# Altium PCB EN_Probe_VR_2.PcbDoc
Units mil, origin at the board's own origin, x right, y up, seen from the top; angles counter-clockwise.
Board outline 1375 x 901.57 mil, 2 copper layers (Top Layer, Bottom Layer); 25 components, 13 nets, 73 pads, 12 vias.
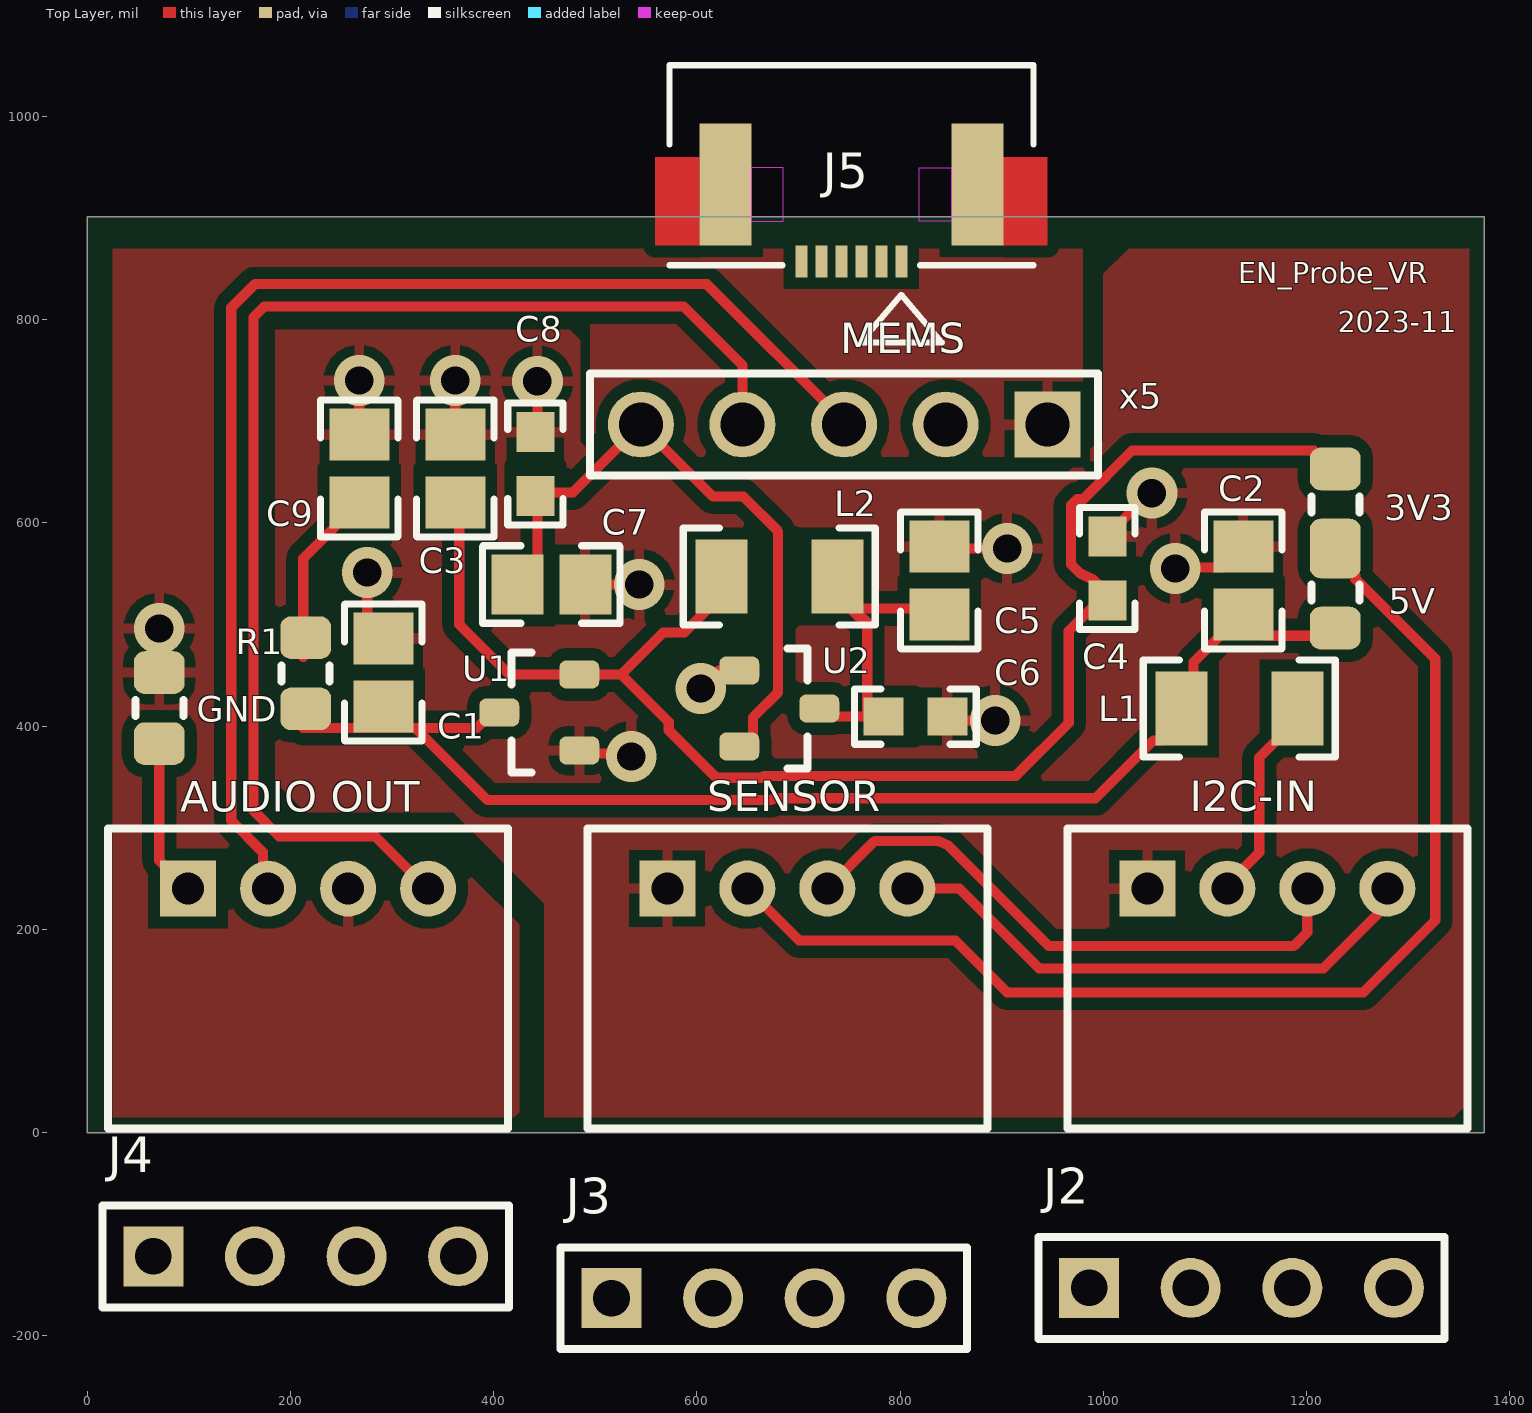
[diagram p0: Top Layer view]
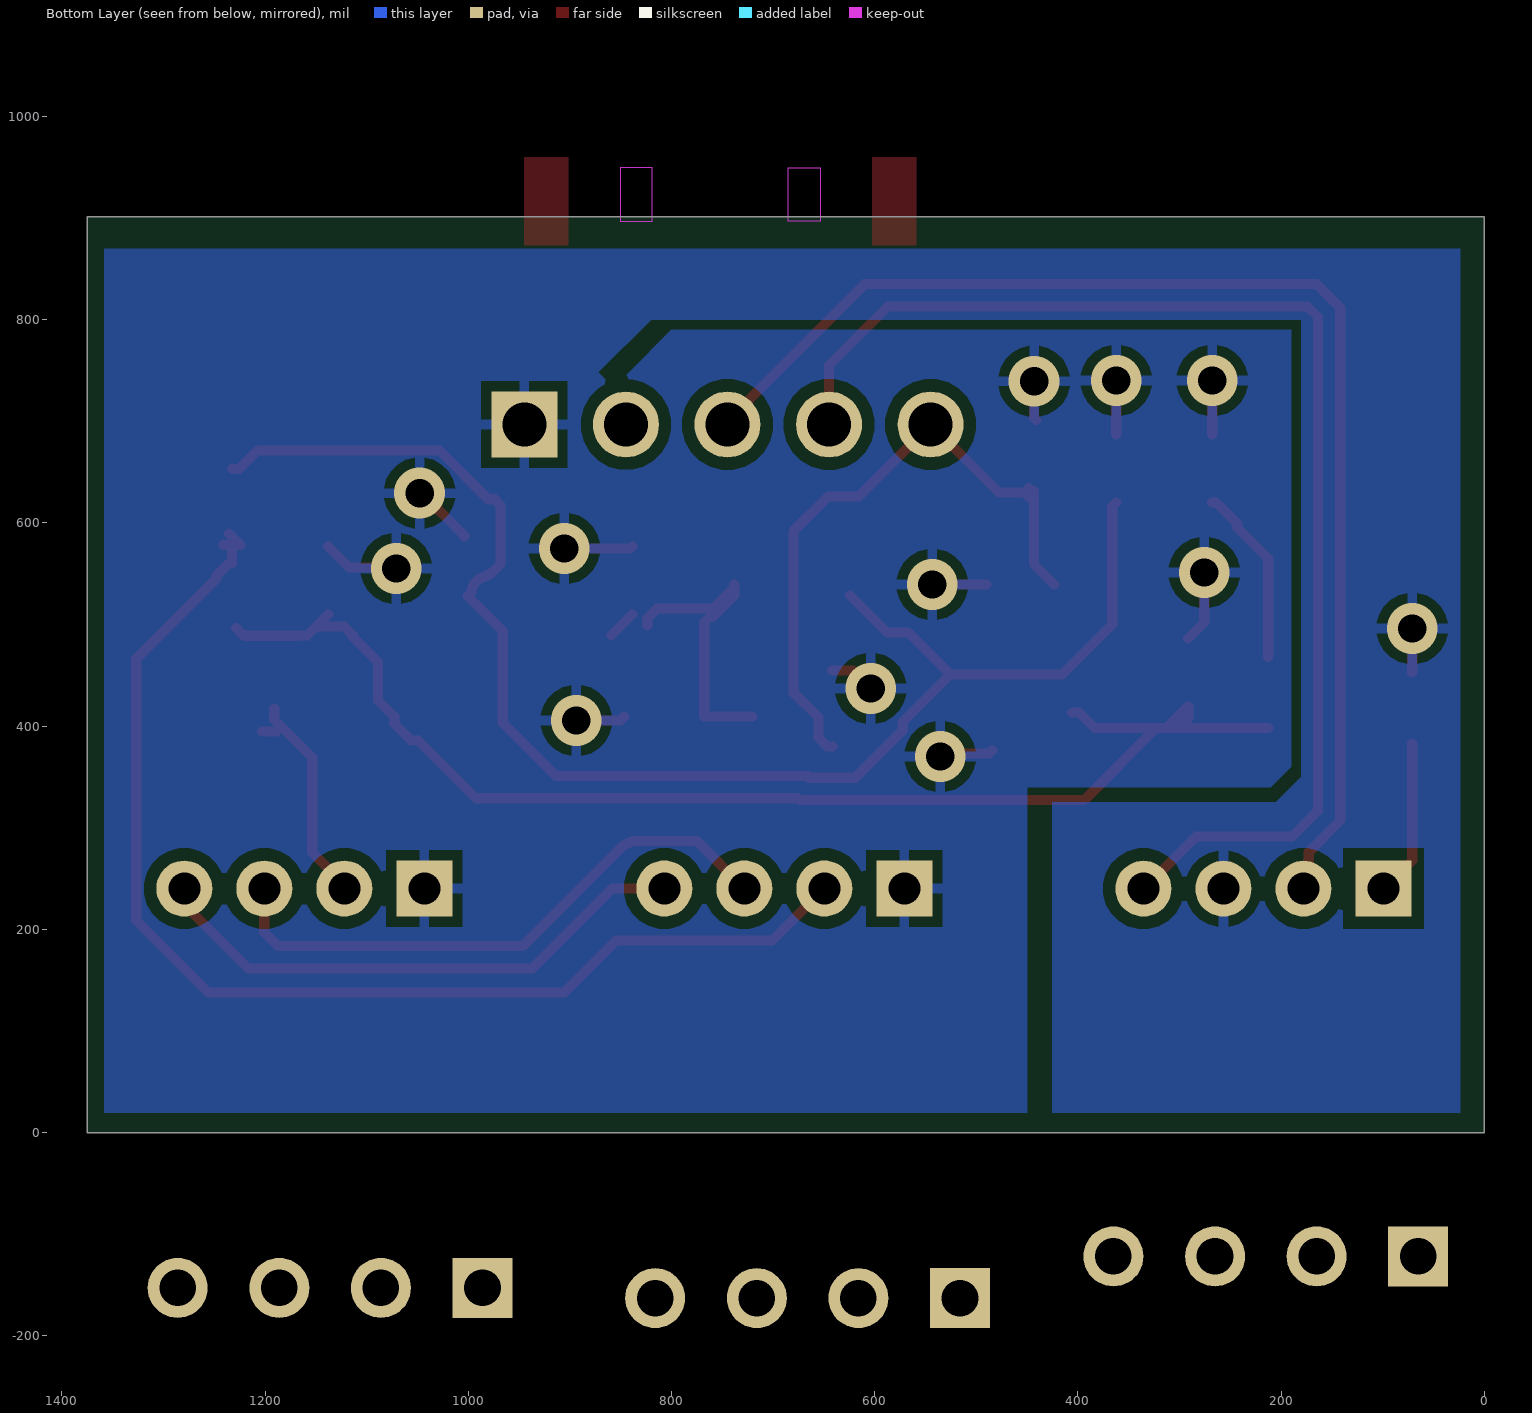
[diagram p1: Bottom Layer view, seen from below]

## Layer stack, top to bottom
Top Solder: solder mask 0.4, Solder Resist, Dk 3.5
Top Layer: signal copper 1.4
Dielectric1: dielectric 12.6, FR-4, Dk 4.8
Bottom Layer: signal copper 1.4
Bottom Solder: solder mask 0.4, Solder Resist, Dk 3.5

## Board outline
0,0 0,901.57 1375,901.57 1375,0

## Design rules (kind name [scope] priority, off if disabled: settings)
Clearance [All] p1: gap=12 ignorepadtopadclearanceinfootprint=FALSE except(0: Arc-Hole Track-Hole SMDPad-Hole THPad-Hole Via-Hole Fill-Hole Poly-Hole Region-Hole Text-Hole)
HoleSize [All] p1: absolutevalues=TRUE maxlimit=200 minlimit=1 maxpercent=80.000 minpercent=20.000
PolygonConnect [All] p1: connectstyle=Relief reliefconductorwidth=10 reliefentries=4 polygonreliefangle="90 Angle" airgapwidth=10
RoutingVias [All] p1: holewidth=28 width=50 viastyle="Through Hole" minholewidth=28 minwidth=50 maxholewidth=28 maxwidth=50
SilkToSilkClearance [All] p1: silktosilkclearance=2
SilkToSolderMaskClearance SilkscreenOverComponentPads [IsPad] p1 off: minsilkscreentomaskgap=10 clearancetoexposedcopper=TRUE
SolderMaskExpansion [All] p1: expansion=4 istentingtop=FALSE
Width [All] p1: maxlimit=30 minlimit=10 preferedwidth=10 minimp=50.000000 maximp=50.000000 favimp=50.000000
27 further rules are at their usual default settings.

## Classes and differential pairs
net class "Power Nets": NetC7_1
component class EN_Probe_VR_Chain_BD1: 3V3 5V C1 C2 C3 C4 C5 C6 C7 C8 C9 GND L1 L2 R1 U1 U2 x5

## Components (designator, comment, footprint, x,y, rotation, side; value= is the part's Value field where it differs from the comment)
3V3 "CRCW080522R0JNEA" 0805#1 1228.35,618.11 r90 top value=22 (schematic designator R3V3)
5V "CRCW080522R0JNEA" 0805#1 1228.35,531.5 r270 top value=22 (schematic designator R5V)
C1 "10uF" 0805#2 291.34,452.76 r90 top
C2 ".33UF" 0805#2 1137.8,543.31 r270 top
C3 "10uF" 0805#2 362.2,653.54 r90 top
C4 "0.1UF" 0603 1003.94,555.12 r90 top
C5 "10uF" 0805#2 838.58,543.31 r90 top
C6 "0.1UF" 0603 814.96,409.45 r180 top
C7 "10uF" 0805#2 456.69,539.37 r0 top
C8 "0.1UF" 0603 441,658 r270 top
C9 "680nF" 0805#2 267.72,653.54 r270 top
GND "CRCW080522R0JNEA" 0805#1 70.87,417.76 r270 top value=22 (schematic designator R3)
J2 "Comment" HDR1X4 986,-153 r0 top
J3 "Comment" HDR1X4 516,-163 r0 top
J4 "Comment" HDR1X4 65,-122 r0 top
J4 "AUDIO OUT" "HDRA1X4 2MM" 99.26,240 r180 top
J5 "Comment" CON_527450697_ 752,952 r180 top
L1 "2.2uH" 1206 1133.86,417.32 r0 top
L2 "1.0uH" 1206 681.1,547.24 r180 top
R1 "CRCW080522R0JNEA" 0805#1 215,452 r270 top value=22
U1 "3.3V REG" SOT23-3 444.88,413.39 r180 top
U2 "2.8V REG" SOT23-3 681.1,417.32 r0 top
x2 "I2C-IN" "HDRA1X4 2MM" 1043.31,240.15 r180 top
x3 "SENSOR" "HDRA1X4 2MM" 570.87,240.16 r180 top
x5 "MEMS" HDR1X5 944.88,696.85 r180 top (schematic designator J5)

## Footprints (in the part's own frame and the unit in brackets; to place one, negate y for a bottom-side part, rotate by r counter-clockwise, add the part's x,y. Pads: shape width x height; smd on the part's side, far side on the other; paste and mask are expansions set on the pad)
0603 [mm] "0603 from SM-752 data"
  rect 1x0.95 smd: 1(-0.8,0) 2(0.8,0)
  silkscreen extent -1.52,-0.69 1.52,0.69, body extent -0.87,-0.47 0.87,0.47, height 1
0805#1 [mil] "Chip Capacitor, 2-Leads, Body 2.0x1.25mm, IPC"
  rrect50% 42x50 smd: 1(-35,0) 2(35,0)
  silkscreen extent -8,-24 8,24, body extent -39,-24 39,24, height 47
0805#2 [mil] "0805 from SM-752 data"
  rect 51.18x59.06 smd: 1(-33.46,0) 2(33.47,0)
  silkscreen extent -68,-38 68,38, body extent -43,-29 43,29, height 57
1206 [mm] "1206 from SM-752 data"
  rect 1.3x1.85 smd: 1(-1.45,0) 2(1.45,0)
  silkscreen extent -2.4,-1.21 2.4,1.21, body extent -1.7,-0.9 1.7,0.9, height 1.35
CON_527450697_ [mm]
  rect 0.3x0.8 smd paste+0 mask+0.076: 1(-1.25,2.4) 2(-0.75,2.4) 3(-0.25,2.4) 4(0.25,2.4) 5(0.75,2.4) 6(1.25,2.4)
  rect 1.3x3.05 smd paste+0 mask+0.076: P1(-3.15,0.475) P2(3.15,0.475)
  Top Layer region: 3.8,-0.2 3.8,2 4.9,2 4.9,-0.2
  Top Layer region: -3.8,-0.2 -3.8,2 -4.9,2 -4.9,-0.2
  Keep-Out Layer region: 2.5,0.06 2.5,1.4 1.7,1.4 1.7,0.06
  Keep-Out Layer region: -2.5,0.06 -2.5,1.4 -1.7,1.4 -1.7,0.06
  silkscreen extent -4.55,-2.5 4.55,4.43
HDR1X4 [mm] "Connector; Header; 4 Position"
  rect 1.5x1.5 hole 0.914: 1(0,0)
  round 1.5 hole 0.914: 2(2.54,0) 3(5.08,0) 4(7.62,0)
  silkscreen extent -1.27,-1.27 8.89,1.27
HDR1X5 [mil]
  rect 65x65 hole 43.31: 1(0,0)
  round 65 hole 43.31: 2(100,0) 3(200,0) 4(300,0) 5(400,0)
  silkscreen extent -50,-50 450,50, body extent -50,-49 450,49, height 336
"HDRA1X4 2MM" [mm] "Connector; Header; 4 Position RA"
  rect 1.4x1.4 hole 0.8: 1(0,0)
  round 1.4 hole 0.8: 2(-2,0) 3(-4,0) 4(-6,0)
  silkscreen extent -8,-1.5 2,6
SOT23-3 [mm] "SOT23, 3-Leads, Body 3.0x2.6mm (max), Pitch 0.95mm, IPC High Density"
  rrect50% 1x0.7 smd: 1(-1,0.95) 2(-1,-0.95) 3(1,0)
  silkscreen extent 0.2,-1.5 0.7,1.5, body extent -1.25,-1.5 1.25,1.5, height 1.1

## Part data
3V3 5V: "RES, 22, 5%, 0.125 W, 0805", Manufacturer=Vishay-Dale, Power_W=0.125, Supplier Part Number 1=541-22ACT-ND, TempCo="200 ppm/C", Tolerance_%=5, Value1=5%, Value2=0.125W, Value_Code=22R0, ValueDisplayed=0.0, AEC Category=Q200, AEC Qualified=?, ComponentLink1Description="Datasheet link", ComponentLink1URL=http://www.vishay.com/docs/20035/dcrcwe3.pdf, CompType=Resistor, EIA_Code=E24, Green_EU RoHS="Passed with Exemption", Green_EU RoHS-2=Passed, Green_Lifecycle=Active, Green_REACh=Passed, LatestRevisionDate=2017-06-14, MountType=SMT, PackageReference=0805, PartNumber=CRCW080522R0JNEA, Published=2008-06-26, Publisher="Texas Instruments", Res_ohm=22, RoHS=Y, SizeArea_mm2=2.5, SizeX_mm=2, SizeY_mm=1.25, SizeZ_mm=1.45, Supplier 1=Digi-Key, Supplier 2=Newark, Supplier 3=Mouser, Supplier Part Number 2=59M6875, Supplier Part Number 3=71-CRCW080522R0JNEA, SymbolVersion=2009-05-29, Technology="Thick Film", U/M=EA, VDC_V=150
C1 C3 C5 C7: library part CAPACITOR, "CAP CER 10UF 25V X5R 0805", Manufacturer Part Number 1=GRM21BR61E106MA73L, Supplier Part Number 1=490-10748-1-ND, Vendor=DIGIKEY, Vendor PN=490-10748-1-ND
C2 C9: library part CAP, "CAP CER 0.33UF 25V X7R 0805", Manufacturer PN=CL21B334KAFNNNG, Supplier Part Number 1=1276-6479-1-ND, Supplier 1=Digi-Key, Vendor=DIGIKEY, Vendor PN=1276-6479-1-ND
C4 C6 C8: library part CAP, "CAP CER 0.1UF 50V X7R 0603", Manufacturer Part Number 1=C0603C104M5RACTU, Supplier Part Number 1=399-7845-2-ND, Manufacturer PN=C0603C104M5RACTU, Part Field 1=0, Part Field 5=1, Part Field 6=0, Part Field 7=1u, Part Field 8=1u, Part Field 9=500u, Part Field 10=1000u, Vendor=DIGIKEY, Vendor PN=399-7845-1-ND
GND: "RES, 22, 5%, 0.125 W, 0805", Manufacturer=Vishay-Dale, Power_W=0.125, Supplier Part Number 1=541-22ACT-ND, TempCo="200 ppm/C", Tolerance_%=5, Value1=5%, Value2=0.125W, Value_Code=22R0, ValueDisplayed=0, AEC Category=Q200, AEC Qualified=?, ComponentLink1Description="Datasheet link", ComponentLink1URL=http://www.vishay.com/docs/20035/dcrcwe3.pdf, CompType=Resistor, EIA_Code=E24, Green_EU RoHS="Passed with Exemption", Green_EU RoHS-2=Passed, Green_Lifecycle=Active, Green_REACh=Passed, LatestRevisionDate=2017-06-14, MountType=SMT, PackageReference=0805, PartNumber=CRCW080522R0JNEA, Published=2008-06-26, Publisher="Texas Instruments", Res_ohm=22, RoHS=Y, SizeArea_mm2=2.5, SizeX_mm=2, SizeY_mm=1.25, SizeZ_mm=1.45, Supplier 1=Digi-Key, Supplier 2=Newark, Supplier 3=Mouser, Supplier Part Number 2=59M6875, Supplier Part Number 3=71-CRCW080522R0JNEA, SymbolVersion=2009-05-29, Technology="Thick Film", U/M=EA, VDC_V=150
J4 x2 x3: library part "Header 4", "CONN HEADER VERT 4POS .100 TIN", Manufacturer="TE Connectivity AMP Connectors", Manufacturer PN=640454-4, Supplier Part Number 1=S1012EC-04-ND, LatestRevisionDate=17-Jul-2002, LatestRevisionNote="Re-released for DXP Platform.", Publisher="Altium Limited", Supplier 1=Digi-Key, Vendor PN=A19431-ND
  J4: Supplier 2=Digi-Key, Supplier Part Number 2=455-1721-ND
L1 L2: library part HI1206T161R-10, "FERRITE BEAD 160 OHM 1206 1LN", Supplier Part Number 1=240-2411-1-ND, Built_By=EMA_Cory, Copyright="Copyright (C) 2018 Accelerated Designs. All rights reserved", Manufacturer_Part_Number=HI1206T161R-10, RefDes=RefDes, SourceLibrary=Laird_2019-12-03, Supplier 1=Digi-Key, Type=DEV, Vendor=Laird
R1: "RES, 22, 5%, 0.125 W, 0805", Manufacturer=Vishay-Dale, Power_W=0.125, Supplier Part Number 1=541-22ACT-ND, TempCo="200 ppm/C", Tolerance_%=5, Value1=5%, Value2=0.125W, Value_Code=22R0, ValueDisplayed=22, AEC Category=Q200, AEC Qualified=?, ComponentLink1Description="Datasheet link", ComponentLink1URL=http://www.vishay.com/docs/20035/dcrcwe3.pdf, CompType=Resistor, EIA_Code=E24, Green_EU RoHS="Passed with Exemption", Green_EU RoHS-2=Passed, Green_Lifecycle=Active, Green_REACh=Passed, LatestRevisionDate=2017-06-14, MountType=SMT, PackageReference=0805, PartNumber=CRCW080522R0JNEA, Published=2008-06-26, Publisher="Texas Instruments", Res_ohm=22, RoHS=Y, SizeArea_mm2=2.5, SizeX_mm=2, SizeY_mm=1.25, SizeZ_mm=1.45, Supplier 1=Digi-Key, Supplier 2=Newark, Supplier 3=Mouser, Supplier Part Number 2=59M6875, Supplier Part Number 3=71-CRCW080522R0JNEA, SymbolVersion=2009-05-29, Technology="Thick Film", U/M=EA, VDC_V=150
U1 U2: library part "Volt Reg", "IC REG LINEAR 2.8V 300MA SOT23-3", Manufacturer Part Number 1=AP2210N-2.8TRE1, Supplier Part Number 1=AP2210N-2.8TRE1-ND, Published=24-Mar-1999, Publisher="Altium Limited", Supplier 1=Digi-Key, Supplier 2=Digi-Key, Supplier Part Number 2=MC78M12CDTRKGOSCT-ND
x5: library part 5, "CONN HEADER VERT 5POS 2.54MM", Manufacturer="Harwin Inc.", Manufacturer PN=61300511121, Package=TH, Supplier Part Number 1=732-5318-ND, ID=5, Part Type="Male Pin Header", Supplier 1=Digi-Key, Vendor=Digikey, Vendor PN=952-2246-ND

## Via types
v1: diameter 50, hole 28, Top Layer to Bottom Layer, 12 vias

## Nets (pads, with @x,y where several pads share a name; then routed paths per layer and width w, separated by ;. In a path a pad name is that pad's centre, name@x,y a point inside that pad or via, vN(x,y) a via of type N, cw(c..) or ccw(c..) an arc to the next point about the centre after c; other vN are vias at no path point)
+3.3V: C5.1 C6.2 L2.1 U2.3 | length 325.5
  Top Layer w10: U2.3@720.47,409.45 767.72,409.45 767.72,429.13 767.72,502.1 761.86,507.95 758.78,507.95 738.19,528.54 L2.1@738.19,536.34 ; L2.1@738.19,539.37 L2.1@738.19,536.34 ; C5.1@823.82,499.02 823.82,505.98 814.06,515.75 758.78,515.75 L2.1@738.19,536.34 ; C5.1 C5.1@859.17,489.25
AGND: C1.2 C2.1 C3.2 C4.2 C5.2 C6.1 C7.2 C8.1 C9.1 GND.1 J4.3@256.74,240 U1.1 U2.1 x2.1 x3.1 x5.1 | length 666.8
  Top Layer w10: GND.1 v1(70.87,496.06) ; C9.1 v1(267.72,740.16) ; v1(275.59,551.18) 275.59,501.97 C1.2 ; C3.2 v1(362.2,740.16) ; C8.1@441,701.31 443.06,703.36 v1(443.06,739.39) ; U1.1 487.2,373.03 532.48,373.03 v1(535.43,370.08) ; C7.2 v1(543.31,539.37) ; v1(603.84,437.01) 621.55,454.73 U2.1 ; C5.2 840.55,574.8 v1(905.51,574.8) ; C6.1 850.39,405.51 v1(893.7,405.51) ; C4.2 1003.94,587.6 1045.67,629.33 v1(1047.91,629.33) ; v1(1070.87,555.12) 1071.93,556.18 1117.2,556.18 C2.1
NetC1_1: 5V.2 C1.1 C2.2 L1.1 R1.2 U1.3 | length 1307.1
  Top Layer w10: R1.2@212.6,398.07 C1.1@300.75,398.07 ; U1.3 398.58,413.39 383.27,398.07 322.93,398.07 ; C2.2 1147.64,500 1158.38,489.25 1167.93,489.25 1168.18,489 1220.85,489 5V.2 ; C2.2@1145.67,498.03 1122.05,498.03 1113.27,489.25 1113.27,487.28 1088.87,462.88 1088.87,425.48 1072.84,409.45 1072.84,402.56 1056.18,385.91 1049.29,385.91 992.38,329 675.39,329 673.53,327.14 393.86,327.14 322.93,398.07 ; C1.1@300.75,398.07 C1.1@312.56,398.07 ; C1.1@300.75,398.07 291.34,407.48 C1.1 291.97,419.29 312.56,398.7 C1.1@312.56,398.07 ; C1.1@312.56,398.07 322.93,398.07
NetC3_1: 3V3.2 C3.1 C4.1 L2.2 U1.2 | length 1475.3
  Top Layer w10: C3.1 366.14,616.14 366.14,500 415.35,450.79 U1.2 525.59,450.79 ; L2.2@624.02,528.54 587.6,492.13 566.93,492.13 525.59,450.79 ; C4.1@997.05,531.5 995.2,538.31 ccw(c980.56,530.68) 990.14,544.12 977.09,550.47 968.24,559.32 968.24,617.44 974.1,623.3 980.32,623.3 1028.34,671.33 1207.09,671.33 1225.31,653.11 3V3.2@1232.28,653.11 ; C4.1@1000,528.55 1000,527.56 966,493.56 966,403.01 913.99,351 666.28,351 664.42,349.14 619.04,349.14 572.32,395.87 572.32,404.06 525.59,450.79
NetC7_1: C7.1 C8.2 U2.2 x5.5 | length 650.1
  Top Layer w10: C7.1 443.26,559.4 443.26,620.43 443.26,631.16 448.63,625.79 452.76,629.92 477.95,629.92 x5.5 615.75,625.98 645.67,625.98 680,591.65 680,433.31 655.25,408.56 655.25,388.56 646.61,379.92 U2.2 ; C8.2@443.31,628.82 C8.2@448.68,634.19
NetC9_2: C9.2 R1.1 | length 177.1
  Top Layer w10: R1.1@212.6,468.07 212.6,564.96 243.19,595.55 243.19,599.49 263.78,620.08 C9.2
NetJ2_2: L1.2 x2.2 | length 215.9
  Top Layer w10: x2.2@1122.05,244.09 1153.54,275.59 1153.54,369.09 1190.95,406.5 L1.2 ; L1.2@1188.61,394.69 1192.55,394.69 L1.2@1202.76,394.69
NetJ2_3: x2.3 x3.3 | length 586.7
  Top Layer w10: x3.3 775.19,287 837.42,287 839.38,286.12 847.44,282.48 946.5,183.42 1187.35,183.42 1200.79,196.85 x2.3@1200.79,244.09
NetJ2_4: x2.4 x3.4 | length 550.8
  Top Layer w10: x3.4 858.27,240.16 937.01,161.42 1216.54,161.42 1270.9,215.78 1270.9,235.46 x2.4@1279.53,244.09
NetJ3_2: 3V3.1 5V.1 x3.2 | length 1191.9
  Top Layer w10: x3.2 700.79,188.98 854.33,188.98 905.51,137.8 1255.91,137.8 1326.77,208.66 1326.77,466.23 1247.96,545.04 1247.96,547.91 1235.58,560.28 1232.72,560.28 3V3.1@1232.72,578.31 ; 3V3.1@1235.45,589.34 1224.41,578.31 1228.35,578.31 3V3.1@1232.72,578.31 ; 3V3.1@1241.02,578.74 1241.02,578.31 3V3.1@1232.72,578.31
NetJ4_1: GND.2 J4.1@99.26,240 | length 154
  Top Layer w10: GND.2 70.87,267.72 J4.1@98.43,240.16
NetJ4_2: J4.2@178,240 x5.3 | length 1258.1
  Top Layer w10: J4.2@177.17,240.16 172.82,244.5 172.82,276 141.73,307.09 141.73,811.73 165,835 609.88,835 744.88,700 x5.3
NetJ4_4: J4.4@335.48,240 x5.4 | length 1256.3
  Top Layer w10: J4.4@334.65,240.16 283.47,291.34 188.98,291.34 163.73,316.58 163.73,802.62 174.11,813 587,813 644.88,755.12 x5.4
pads on no net: J2.1 J2.2 J2.3 J2.4 J3.1 J3.2 J3.3 J3.4 J4.1@65,-122 J4.2@165,-122 J4.3@265,-122 J4.4@365,-122 J5.1 J5.2 J5.3 J5.4 J5.5 J5.6 J5.P1 J5.P2 x5.2

## Polygon pours and split planes (outlines as drawn)
AGND on Bottom Layer "AGND_L02_P000" (solid, pour order 0): 23.62,870.08 23.62,763.78 23.62,19.68 1358.27,19.68 1358.27,870.08
AGND on Top Layer "AGND_L01_P002" (solid, pour order 2): 425,20 420,15 25,15 25,870 980,870 980,730 915,665 515,665 495,685 495,800 180,800 180,350 215,315 315,315 425,205
AGND on Top Layer "AGND_L01_P001" (solid, pour order 1): 185,790 185,345 215,315 360,315 450,225 450,15 1345,15 1360,30 1360,870 1025,870 1000,845 1000,680 995,680 965,650 515,650 485,680 485,780 475,790

## Other copper
Bottom Layer:
  pour cut-out: 425,0 425,325 205,325 180,350 180,800 820,800 871.87,748.13 856.87,733.13 800,790 190,790 190,360 210,340 450,340 450,0

## Silkscreen, mask and mechanical layers (free items; w line width, h text height)
Top Overlay:
  text "EN_Probe_VR" at 1133,829 h35
  text "2023-11" at 1231,781 h35
Mechanical 1:
  the board outline again, w10

## Text inside footprints (layer, text, board x,y; h text height)
J5: Mechanical 13 "527450697" at 864.5,652 h50 r180